# Altium PCB SuscoderPCBRotated.PcbDoc
Units mm, origin at the board's own origin, x right, y up, seen from the top; angles counter-clockwise.
Board outline 25.4 x 25.4 mm, 2 copper layers (Top Layer, Bottom Layer); 11 components, 9 nets, 40 pads, 12 vias.
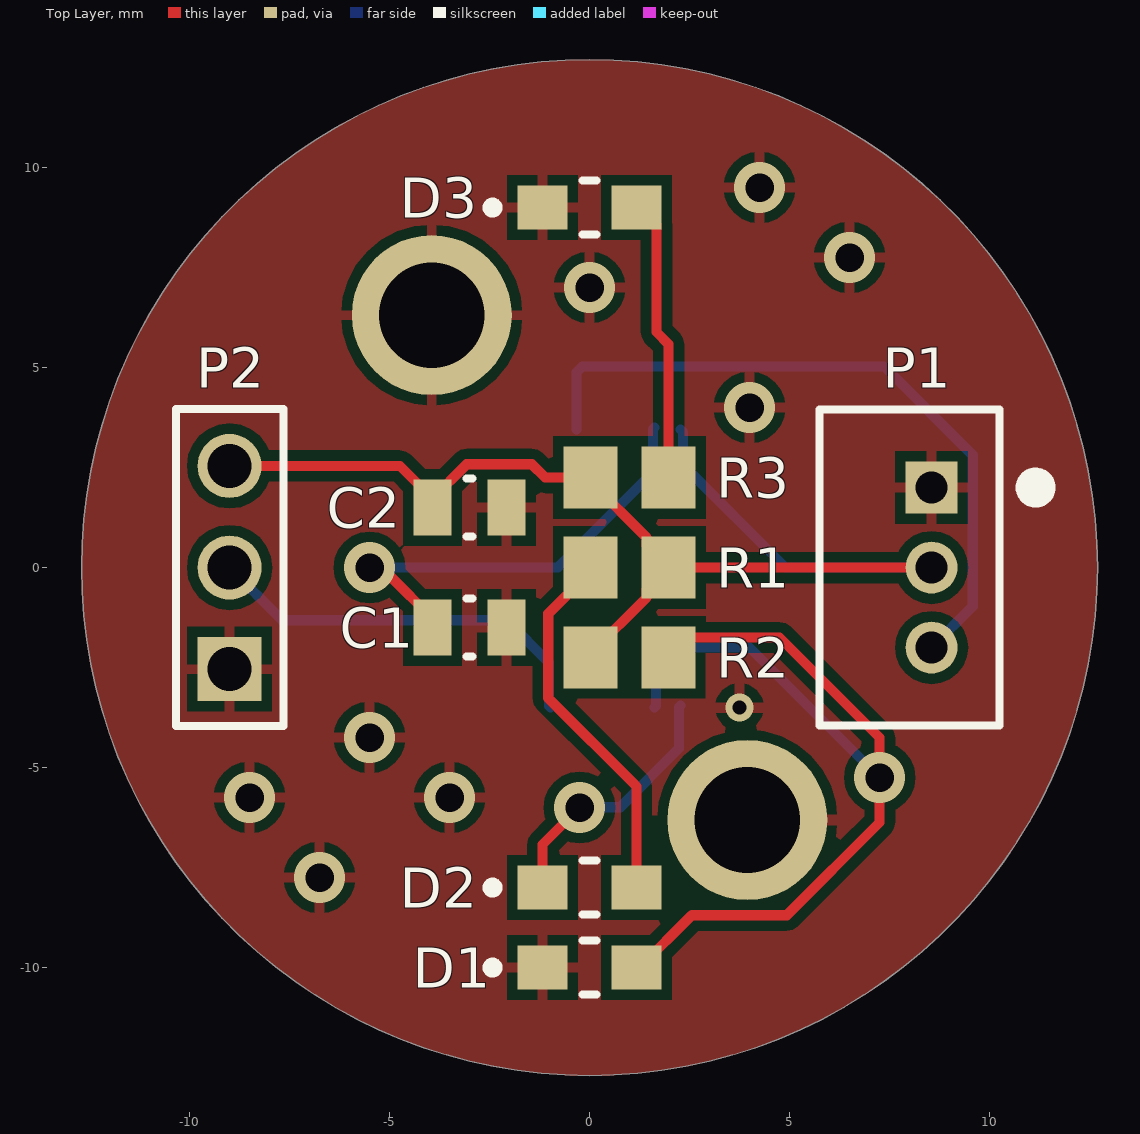
[diagram p0: Top Layer view]
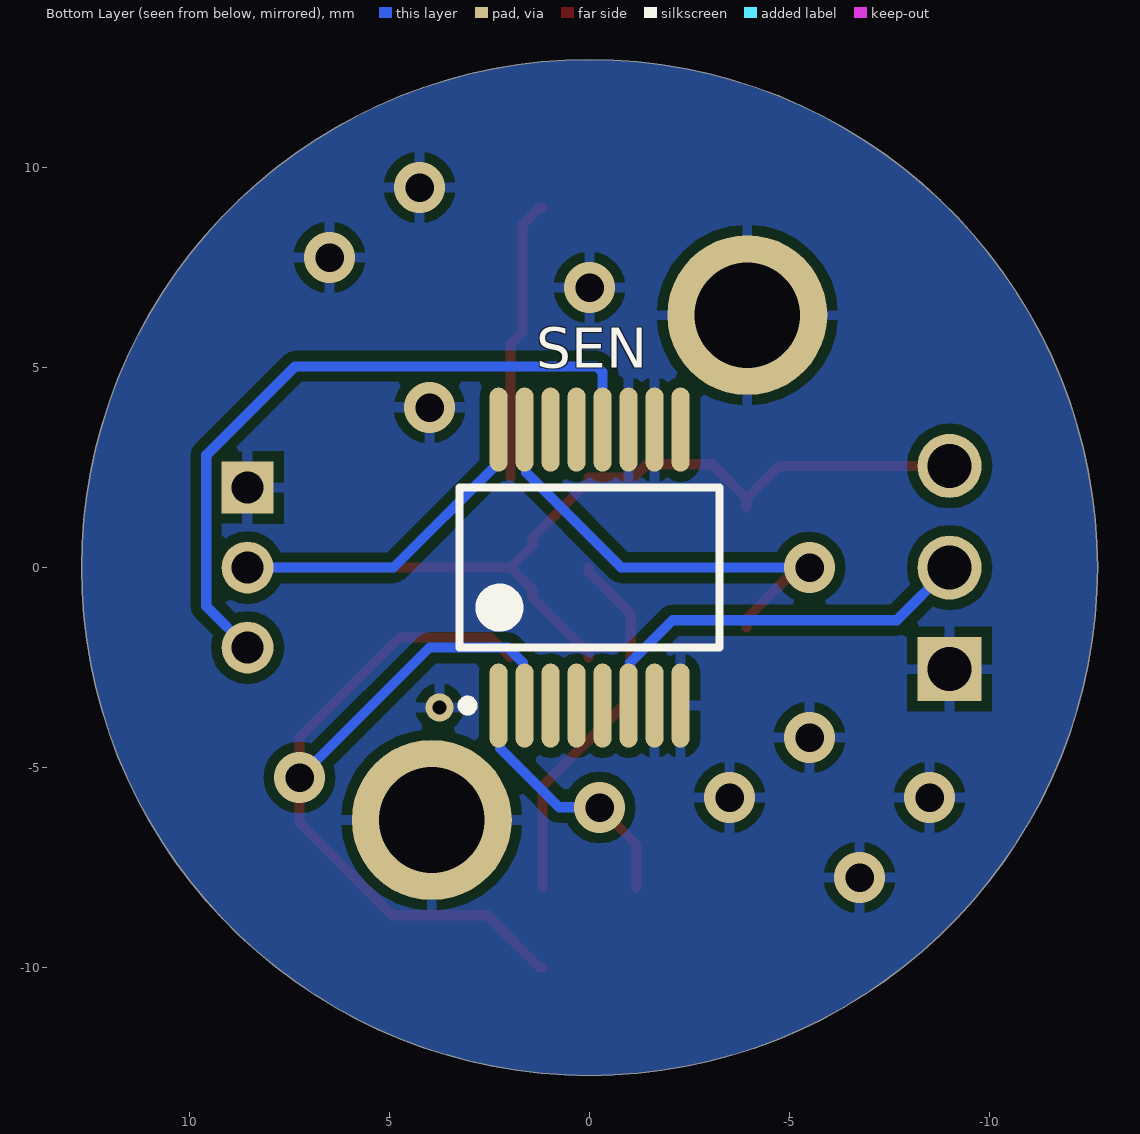
[diagram p1: Bottom Layer view, seen from below]
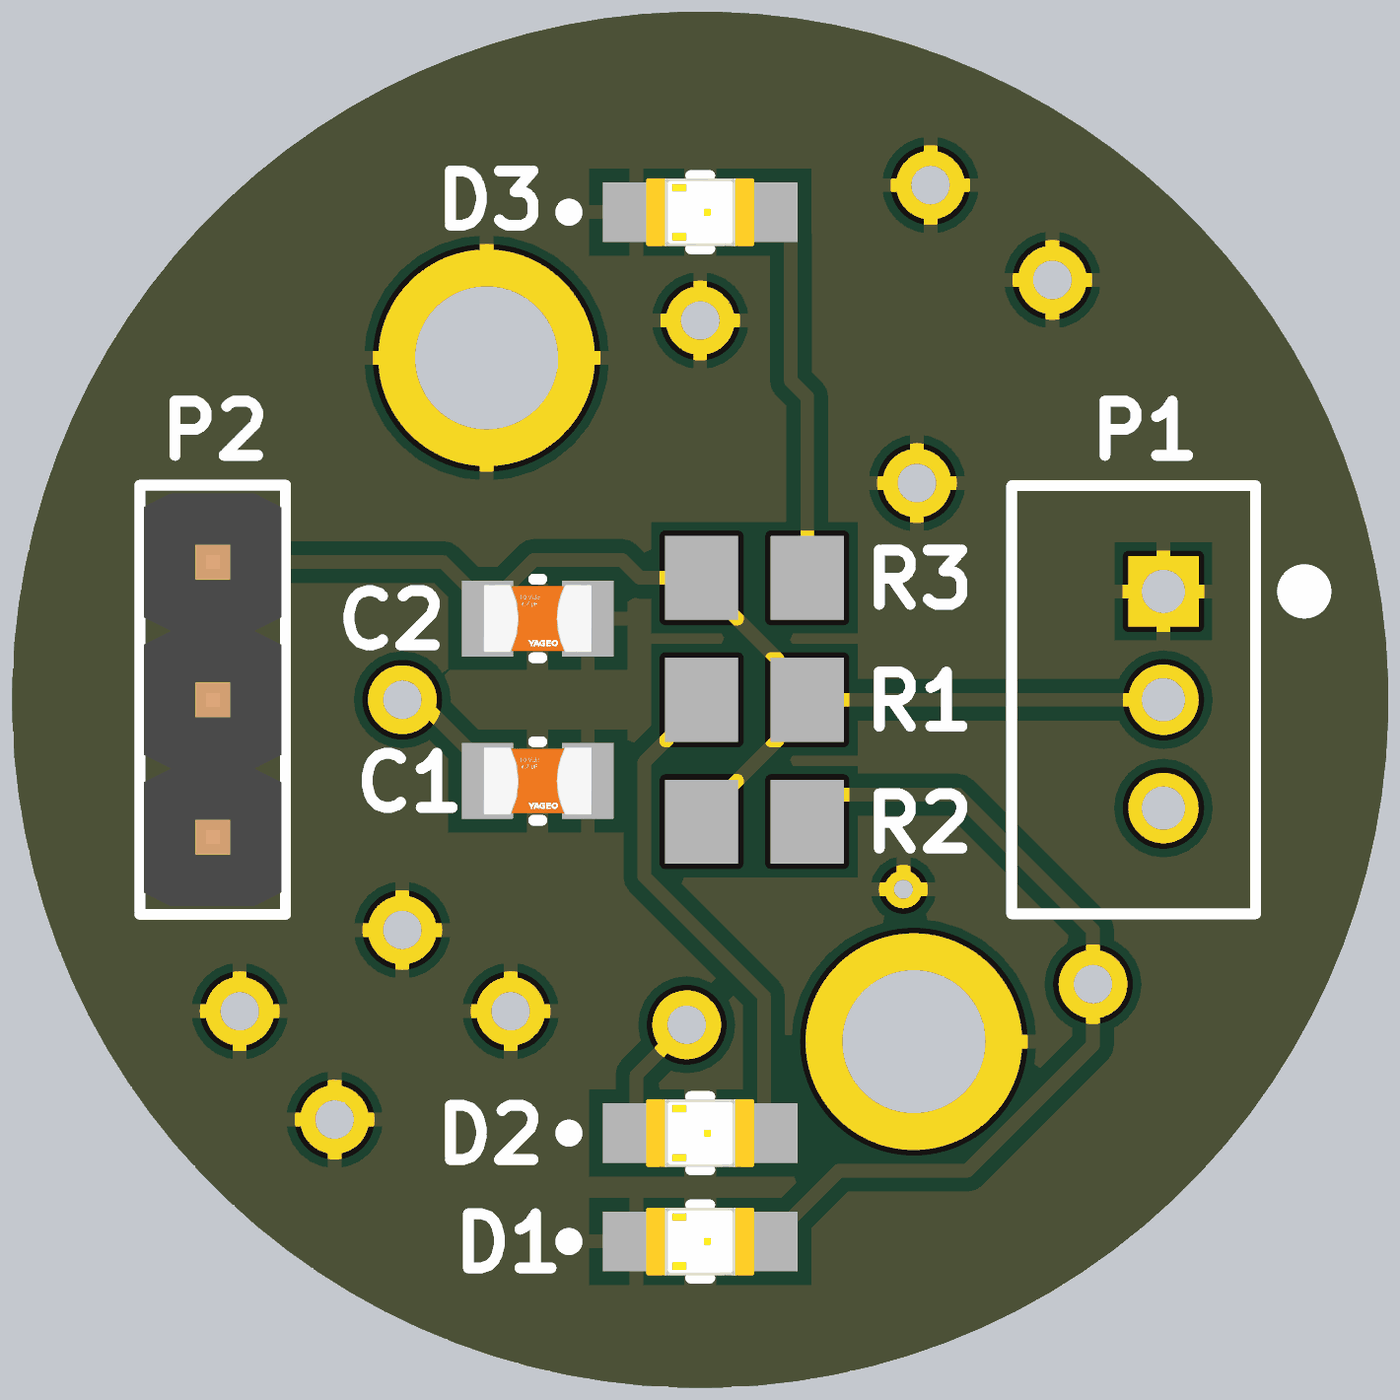
[diagram p2: 3D render of the assembled board from above, using the file's embedded part models]

## Layer stack, top to bottom
Top Solder: solder mask 0.0102, Solder Resist, Dk 3.5
Top Layer: signal copper 0.0356
Dielectric 1: dielectric 0.32, FR-4, Dk 4.8
Bottom Layer: signal copper 0.0356
Bottom Solder: solder mask 0.0102, Solder Resist, Dk 3.5

## Board outline
0,-12.7 cw(c0,0) -12.7,0 cw(c0,0) 0,12.7 cw(c0,0) 12.7,0 cw(c0,0)

## Design rules (kind name [scope] priority, off if disabled: settings)
Clearance [All] p1: gap=0.254 ignorepadtopadclearanceinfootprint=TRUE except(0: Arc-Hole Track-Hole SMDPad-Hole THPad-Hole Via-Hole Fill-Hole Poly-Hole Region-Hole Text-Hole)
HoleSize [IsVia] p1: absolutevalues=TRUE maxlimit=2.54 minlimit=0.025 maxpercent=80.000 minpercent=20.000
MinimumSolderMaskSliver MinimumSolderMaskSliver_MH [HasFootprint('AMS-SSOP-16-6200X5300DE_A_N') vs HasPad('Free-MH')] p1: minsoldermaskwidth=0.2
MinimumSolderMaskSliver [All] p2: minsoldermaskwidth=0.254
PolygonConnect [All] p1: connectstyle=Relief reliefconductorwidth=0.254 reliefentries=4 polygonreliefangle="90 Angle" airgapwidth=0.254
RoutingVias [All] p1: holewidth=0.711 width=1.27 viastyle="Through Hole" minholewidth=0.711 minwidth=1.27 maxholewidth=0.711 maxwidth=1.27
SolderMaskExpansion [All] p1: expansion=0.102 istentingtop=FALSE
Width [All] p1: maxlimit=0.254 minlimit=0.254 preferedwidth=0.254
28 further rules are at their usual default settings.

## Classes and differential pairs
component class SuscoderSCH: C1 C2 D3 P1 P2 R1 R2 R3 SEN

## Components (designator, comment, footprint, x,y, rotation, side; value= is the part's Value field where it differs from the comment)
C1 "CC0805KKX7R7BB475" FP-CC0805-0_85-MFG -3,-1.5 r0 top value="4.7 uF"
C2 "CC0805KRX7R7BB104" FP-CC0805-0_85-MFG -3,1.5 r0 top value="100 nF"
D1 "APT2012LZGCK" FP-APT2012LSYCK-J3-PRV-MFG 0,-10 r0 top
D2 "APT2012LSECK/J3-PRV" FP-APT2012LSYCK-J3-PRV-MFG 0,-8 r0 top
D3 "APT2012LSYCK/J3-PRV" FP-APT2012LSYCK-J3-PRV-MFG 0,9 r0 top
P1 "B3B-PH-K-S(LF)(SN)" JST-B3B-PH-K-S-3_V 8,0 r270 top
P2 "61300311121" 61300311121 -9,0 r90 top
R1 "ERJ-6ENF1501V" RESC2013X70X40ML20T20 1,0 r0 top
R2 "ERJ6ENF1201V" RESC2013X70X40ML20T20 1,-2.25 r180 top
R3 "ERJ-6ENF1501V" RESC2013X70X40ML20T20 1,2.25 r180 top
SEN "AS5045ASST" AMS-SSOP-16-6200X5300DE_A_N 0,0 r90 bottom locked

## Footprints (in the part's own frame and the unit in brackets; to place one, negate y for a bottom-side part, rotate by r counter-clockwise, add the part's x,y. Pads: shape width x height; smd on the part's side, far side on the other; paste and mask are expansions set on the pad)
61300311121 [mm] "Pin Header, pitch 2.54 mm, THT, Vertical, single row, 3p"
  rect 1.6x1.6 hole 1.1: 1(-2.54,0)
  round 1.6 hole 1.1: 2(0,0) 3(2.54,0)
  silkscreen extent -3.96,-1.35 3.96,1.34, body extent -3.81,-1.27 3.81,1.27, height 8.57
AMS-SSOP-16-6200X5300DE_A_N [mm] "SOP, 16-Leads, Body 6.2x5.3mm, Pitch 0.65mm, IPC Medium Density"
  oval 2.1x0.45 smd: 1(-3.45,2.275) 2(-3.45,1.625) 3(-3.45,0.975) 4(-3.45,0.325) 5(-3.45,-0.325) 6(-3.45,-0.975) 7(-3.45,-1.625) 8(-3.45,-2.275) 9(3.45,-2.275) 10(3.45,-1.625) 11(3.45,-0.975) 12(3.45,-0.325) 13(3.45,0.325) 14(3.45,0.975) 15(3.45,1.625) 16(3.45,2.275)
  silkscreen extent -3.57,-3.25 2,3.25, body extent -2.8,-3.25 2.8,3.25, height 2
FP-APT2012LSYCK-J3-PRV-MFG [mm]
  rect 1.25x1.1 smd paste+0 mask+0: 1(-1.175,0) 2(1.175,0)
  silkscreen extent -2.55,-0.67 0.18,0.67, body extent -1.9,-0.77 1.9,0.77, height 0.25
FP-CC0805-0_85-MFG [mm]
  rect 0.95x1.4 smd paste+0 mask+0: 1(-0.925,0) 2(0.925,0)
  silkscreen extent -0.07,-0.72 0.08,0.72, body extent -1.6,-1.05 1.6,1.05, height 0.25
JST-B3B-PH-K-S-3_V [mm] "Connector, 3-Leads, Body 7.9x4.5mm, Pitch 2mm"
  rect 1.3x1.3 hole 0.8: 1(-2,0.55)
  round 1.3 hole 0.8: 2(0,0.55) 3(2,0.55)
  silkscreen extent -3.95,-2.25 3.95,3.4, body extent -3.95,-2.25 3.95,2.25, height 6
RESC2013X70X40ML20T20 [mm] "Chip Resistor, 2-Leads, Body 2.00x1.25mm, IPC Low Density"
  rect 1.35x1.55 smd: 1(-0.975,0) 2(0.975,0)
  body extent -1.1,-0.72 1.1,0.72, height 0.7

## Part data
C1: library part CMP-03422-000207-1, "CAP CER 4.7UF 16V X7R 0805", Capacitance="4.7 uF", Manufacturer=Yageo, Package=CC0805-0.85, Temperature="-30°C to +85°C", Temperature Characteristic=X7R, Temperature Range High=+85°C, Temperature Range Low=-30°C, Tolerance=0.1, Voltage Rating="16 V", Automotive=No, Category=Cap, ComponentLink2Description=Datasheet, ComponentLink2URL=http://www.yageo.com/documents/recent/UPY-GPHC_Y5V_6.3V-to-50V_8.pdf, Device Class L1="Passive Components", Device Class L2=Capacitors, Device Class L3="Ceramic Capacitors", Digikey Description="CAP CER 4.7UF 16V X7R 0805", Footprint Url=http://www.yageo.com/exep/pages/download/literatures/UPY-C_GEN_24.pdf, Height=0.95mm, Ipc Land Pattern Name=CAPC200125X85, Lead Free=Yes, Manufacturer Part Number=CC0805KKX7R7BB475, Material=Ceramic, Mouser Description="Multilayer Ceramic Capacitors MLCC - SMD/SMT 4.7M pF 10% 16 Volts", Octopart=https://octopart.com/cc0805kkx7r7bb475-yageo-34429188, RoHS=TRUE
C2: library part CMP-1036-04402-6, "CAP CER 0.1UF 16V X7R 0805", Capacitance="100 nF", Manufacturer=Yageo, Package=CC0805-0.85, Temperature="-30°C to +85°C", Temperature Characteristic=X7R, Temperature Range High=+85°C, Temperature Range Low=-30°C, Tolerance=0.1, Voltage Rating="16 V", Automotive=No, Category=Cap, ComponentLink2Description=Datasheet, ComponentLink2URL=http://www.yageo.com/documents/recent/UPY-GPHC_Y5V_6.3V-to-50V_8.pdf, Device Class L1="Passive Components", Device Class L2=Capacitors, Device Class L3="Ceramic Capacitors", Digikey Description="CAP CER 0.1UF 16V X7R 0805", Footprint Url=http://www.yageo.com/exep/pages/download/literatures/UPY-C_GEN_24.pdf, Height=0.95mm, Ipc Land Pattern Name=CAPC200125X85, Lead Free=Yes, Manufacturer Part Number=CC0805KRX7R7BB104, Material=Ceramic, Mouser Description="Multilayer Ceramic Capacitors MLCC - SMD/SMT 100nF 16V X7R 10%", Octopart=https://octopart.com/cc0805krx7r7bb104-yageo-39467769, RoHS=TRUE
D1: library part CMP-007-00039-1, "2.0X1.2mm Low Current Green SMD LED; Water Clear; 525nm; 140° Viewing Angle"
D2: library part CMP-007-00037-1, "2.0X1.2mm Low Current Red SMD LED; Water Clear; 625nm; 140° Viewing Angle"
D3: library part CMP-44529-000012-1, "LED YELLOW CLEAR 2SMD", Colour=Yellow, Forward Current=2mA, Forward Voltage=1.85V, Manufacturer=Kingbright, Max Junction Temp=+115°C, Package=0, Power Dissipation=75mW, Reverse Voltage=5V, Temperature="-40°C to +85°C", Temperature Range High=+85°C, Temperature Range Low=-40°C, Automotive=No, Category=Diode, ComponentLink2Description=Datasheet, ComponentLink2URL=http://www.kingbrightusa.com/images/catalog/SPEC/APT2012LSYCK-J3-PRV.pdf, Device Class L1=Optoelectronics, Device Class L2=LEDs, Device Class L3=unset, Digikey Description="LED YELLOW CLEAR 2SMD", Height=0.85mm, Lead Free=Yes, Led Orientation="Top View", Luminous Intensity=25mcd, Manufacturer Part Number=APT2012LSYCK/J3-PRV, Mouser Description="Standard LEDs - SMD 2.0X1.2MM LOW CRNT", Octopart=https://octopart.com/apt2012lsyck%2Fj3-prv-kingbright-56784114, Peak Emmision Wavelength=590nm, RoHS=TRUE, Viewing Angle=140°, Wavelength=590nm
P1: library part CMP-2000-05164-1, "Male Header, Pitch 2 mm, 1 x 3 Position, Height 6 mm, Tail Length 3.4 mm, -25 to 85 degC, RoHS, Bulk", Manufacturer=JST, Datasheet URL=https://datasheet.ciiva.com/11746/0900766b80826550-11746939.pdf, Datasheet Version=Oct-06, Manufacturer URL=http://www.jst.com/home2.html, No of Positions=3, Pitch=2mm, Style/Orientation=StraightHeader/Plug, Termination=Crimp, Type=ShroudedHeader
P2: library part CMP-1502-01062-1, "THT Vertical Pin Header WR-PHD, Pitch 2.54 mm, Single Row, 3 pins", Contact Resistance=20mOhm, Manufacturer="Wurth Elektronik", Operating Temperature=-40to105degC, Rated Current=3A, Withstanding Voltage=500VAC, Working Voltage=250VAC, Datasheet URL=https://katalog.we-online.de/em/datasheet/6130xx11121.pdf, Gender=Male, Manufacturer URL=http://www.we-online.de, Mounting Technology=THT, Orientation=Vertical, Package Reference=61300311121, Packaging=Bag, Part Number=61300311121, Pin Number=3, Pitch=2.54mm, Publisher=WurthElektronik, Row Number=Single
R1 R3: library part CMP-2001-04438-1, Manufacturer=Panasonic, Resistance="1.5 kOhms", Part Number=ERJ-6ENF1501V
R2: library part CMP-2001-00512-1, Manufacturer=Panasonic, Resistance="1.2 kOhms", Part Number=ERJ6ENF1201V
SEN: library part CMP-0555-00017-2, "12 Bit Programmable Magnetic Rotary Encoder, 3.3 or 5 V, SSOP-16, Pb-Free, Reel", Manufacturer=AMS, Supply Voltage (V)="3.3 or 5.0", Code_JEDEC="MO - 150 AC", ComponentLink1Description="Manufacturer URL", ComponentLink1URL=www.ams.com, ComponentLink2Description=Datasheet, ComponentLink2URL=http://www.ams.com/eng/content/download/1288/7223/496, DatasheetVersion="Rev. 1.7", Features="pin-compatible to AS5040, higher resolution", Mounting Technology="Surface Mount", Output="absolute serial SSI, PWM", PackageDescription="16-Pin Shrink Small Outline Package, 6.2 x 5.3 mm Body, 0.65 mm Pitch", PackageReference=SSOP-16, PackageVersion="Rev. 1.7, 06/2010", PartNumber=AS5045ASST, Resolution="12 bit"

## Free pads (board coordinates)
  round 4 hole 2.642: MH(-3.944,6.311) MH(3.944,-6.311)

## Via types
v1: diameter 1.27, hole 0.711, Top Layer to Bottom Layer, 11 vias
v2: diameter 0.7, hole 0.35, Top Layer to Bottom Layer, 1 vias

## Nets (pads, with @x,y where several pads share a name; then routed paths per layer and width w, separated by ;. In a path a pad name is that pad's centre, name@x,y a point inside that pad or via, vN(x,y) a via of type N, cw(c..) or ccw(c..) an arc to the next point about the centre after c; other vN are vias at no path point)
GND: C1.2 C2.2 D1.1 D3.1 P1.1 P2.1 pad.MH SEN.7 SEN.8 SEN.10 SEN.11
  other v1: -6.75,-7.75 -8.5,-5.75 -3.5,-5.75 -5.5,-4.25 4,4 0,7 6.5,7.75 4.25,9.5
  other v2: 3.75,-3.5
NetC1_1: C1.1 SEN.15 | length 11.5
  Top Layer w0.254: v1(-5.5,0) -5.306,-0.194 -5.006,-0.194 -3.925,-1.275 C1.1
  Bottom Layer w0.254: v1(-5.5,0) -0.793,0 1.587,2.38 1.587,3.463 SEN.15@1.625,3.5
NetC2_1: C2.1 P1.2 P2.3 R1.2 R2.2 R3.2 SEN.16 | length 31
  Top Layer w0.254: P2.3 -4.74,2.54 C2.1@-3.925,1.725 ; C2.1 C2.1@-3.925,1.725 ; R2.2 0.025,-2.15 1.427,-0.748 1.427,-0.548 R1.2 ; P1.2 R1.2 ; C2.1@-3.925,1.725 -3.069,2.581 -1.442,2.581 -1.111,2.25 R3.2 0.025,2.15 1.427,0.748 1.427,0.548 R1.2
  Bottom Layer w0.254: SEN.16 2.339,3.386 2.339,2.561 4.9,0 P1.2
NetD1_2: D1.2 R2.1 SEN.2 | length 24.4
  Top Layer w0.254: D1.2 1.25,-10 2.558,-8.692 4.93,-8.692 7.25,-6.372 7.25,-4.25 4.75,-1.75 2.475,-1.75 R2.1@1.989,-2.236
  Bottom Layer w0.254: SEN.2@1.625,-3.5 1.663,-3.463 1.663,-2.38 2.043,-2 4,-2 v1(7.25,-5.25)
NetD2_1: D2.1 SEN.1 | length 6.6
  Top Layer w0.254: D2.1 -1.175,-6.925 v1(-0.25,-6)
  Bottom Layer w0.254: v1(-0.25,-6) -0.241,-5.991 0.766,-5.991 2.237,-4.52 2.237,-3.488 SEN.1
NetD2_2: D2.2 R1.1 | length 9.4
  Top Layer w0.254: R1.1 0.025,-0.1 -1.031,-1.156 -1.031,-3.263 1.175,-5.469 D2.2
NetD3_2: D3.2 R3.1 | length 7.1
  Top Layer w0.254: D3.2 1.25,9 1.673,8.577 1.673,5.889 1.975,5.587 R3.1
NetP1_3: P1.3 SEN.12 | length 17.6
  Bottom Layer w0.254: SEN.12 -0.325,4.881 -0.176,5.03 7.359,5.03 9.581,2.808 9.581,-0.969 P1.3
NetP2_2: P2.2 SEN.6 | length 10.1
  Bottom Layer w0.254: P2.2 -7.681,-1.319 -2.074,-1.319 -1.013,-2.38 -1.013,-3.463 SEN.6@-0.975,-3.5
pads on no net: SEN.3 SEN.4 SEN.5 SEN.9 SEN.13 SEN.14

## Polygon pours and split planes (outlines as drawn)
GND on Bottom Layer "GND_L02_P001" (solid, remove dead copper, pour order 1): 0,-12.7 cw(c0,0) -12.7,0 cw(c0,0) 0,12.7 cw(c0,0) 12.7,0 cw(c0,0)
GND on Top Layer "GND_L01_P000" (solid, remove dead copper, pour order 0): 0,-12.7 cw(c0,0) -12.7,0 cw(c0,0) 0,12.7 cw(c0,0) 12.7,0 cw(c0,0)

## Silkscreen, mask and mechanical layers (free items; w line width, h text height)
Mechanical 1:
  circle w0.254: c0,0 r12.7
  lines w0.254: -3.944,6.311 ccw(c0,0) 3.944,-6.311